# EAGLE board S.N.A.I.L (EAGLE 9.7.0)

Size 238.16 x 131.44 mm. Coordinates in mm from the lower left corner, seen from the top.
Outline: 0,0 238.16,0 238.16,131.44 0,131.44 0,0
Copper layers (1*16): Top 0.035mm / dielectric 1.5mm / Bottom 0.035mm
Design rules "default": minimum track width 6mil, minimum drill 0.35mm, track to track 6mil, track to pad 6mil, pad to pad 6mil, via to via 6mil, smd to smd 6mil, copper to edge 40mil, drill to drill 6mil, minimum pad ring 10mil, minimum via ring 8mil, stop-mask expansion 4mil, vias tented up to drill 0mil, thermal gap 10mil

## Footprints (pad centres in the part's own frame; a part is rotated, then mirrored left to right if it is on the bottom)
1X08 = drill 1.016 long: 1 -8.89,0; 2 -6.35,0; 3 -3.81,0; 4 -1.27,0; 5 1.27,0; 6 3.81,0; 7 6.35,0; 8 8.89,0
PIEZO = drill 1 pad 1.6: 1 -3.5,0; 2 3.5,0
RESAD1016W63L850D250B = drill 0.83 pad 1.43: 1 -5.08,0; 2 5.08,0
SWITCH-MOMENTARY-PTH-6.5MM = drill 1.016 pad 1.88: 1 -3.251,2.261; 2 3.251,2.261; 3 -3.251,-2.261; 4 3.251,-2.261
SM-S2309S = drill 1.016 long: 1 -2.54,0; 2 0,0; 3 2.54,0
ARDUINO-UNO-R3-SHIELD = drill 1.016 pad 1.88: 3.3V 24.13,-2.54; 5V 24.13,0; A0 24.13,12.7; A1 24.13,15.24; A2 24.13,17.78; A3 24.13,20.32; A4 24.13,22.86; A5 24.13,25.4; AREF -24.13,-13.97; D2 -24.13,20.32; D3 -24.13,17.78; D4 -24.13,15.24; D5 -24.13,12.7; D6 -24.13,10.16; D7 -24.13,7.62; D8 -24.13,3.81; D9 -24.13,1.27; D10 -24.13,-1.27; D11 -24.13,-3.81; D12 -24.13,-6.35; D13 -24.13,-8.89; GND@0 24.13,2.54; GND@1 24.13,5.08; GND@2 -24.13,-11.43; IOREF 24.13,-7.62; NC 24.13,-10.16; RES 24.13,-5.08; RX -24.13,25.4; SCL -24.13,-19.05; SDA -24.13,-16.51; TX -24.13,22.86; VIN 24.13,7.62

## Placement (x,y rotation side)
KEYPAD1  KEYPAD-4X4  [1X08]  13.41,66.27 0 top
PIEZO1  PIEZO  [PIEZO]  146.43,30.08 180 top
R1  1k  [RESAD1016W63L850D250B]  152.78,35.16 90 top
S1  SWITCH_MOMENTARY  [SWITCH-MOMENTARY-PTH-6.5MM]  130.9,26.1 90 top
SERVO4  SERVOSM-S2309S  [SM-S2309S]  230.76,16.73 0 top
SERVO5  SERVOSM-S2309S  [SM-S2309S]  231.18,70.1 0 top
SERVO6  SERVOSM-S2309S  [SM-S2309S]  231.05,125.16 0 top
SERVOSERVO_SERVO_8  SERVOSM-S2309S  [SM-S2309S]  189.26,125.06 0 top
SERVOSERVO_SERVO_9  SERVOSM-S2309S  [SM-S2309S]  190.05,69.95 0 top
SERVOSERVO_SERVO_10  SERVOSM-S2309S  [SM-S2309S]  191.53,16.66 0 top
U1  ARDUINO-UNO-R3-SHIELD  [ARDUINO-UNO-R3-SHIELD]  93.68,29.84 270 top

## Library data of the parts
KEYPAD1 PIEZO1 R1 S1 SERVO4-SERVO6 SERVOSERVO_SERVO_8-SERVOSERVO_SERVO_10 U1 = Tinkercad

## Nets
PIEZO1_1: PIEZO1.1 R1.1
S1_4: PIEZO1.2 S1.4
U1_5V: R1.2 SERVO4.1 SERVO5.1 SERVO6.1 SERVOSERVO_SERVO_8.1 SERVOSERVO_SERVO_9.1 SERVOSERVO_SERVO_10.1 U1.5V
U1_A2: S1.1 U1.A2
U1_A4: SERVO5.2 U1.A4
U1_A5: SERVO6.2 U1.A5
U1_D2: KEYPAD1.8 U1.D2
U1_D3: KEYPAD1.7 U1.D3
U1_D4: KEYPAD1.6 U1.D4
U1_D5: KEYPAD1.5 U1.D5
U1_D6: KEYPAD1.4 U1.D6
U1_D7: KEYPAD1.3 U1.D7
U1_D8: SERVOSERVO_SERVO_8.2 U1.D8
U1_D9: SERVOSERVO_SERVO_9.2 U1.D9
U1_D10: SERVOSERVO_SERVO_10.2 U1.D10
U1_D11: KEYPAD1.2 U1.D11
U1_D12: KEYPAD1.1 U1.D12
U1_D13: SERVO4.2 U1.D13
U1_GND: SERVO4.3 SERVO5.3 SERVO6.3 SERVOSERVO_SERVO_8.3 SERVOSERVO_SERVO_9.3 SERVOSERVO_SERVO_10.3 U1.GND@0 U1.GND@1 U1.GND@2

## Tracks (layer width: path | path; a pad name or v marks a point on that pad's centre or on a via)
PIEZO1_1  (1 unrouted)
S1_4  (1 unrouted)
U1_5V  (7 unrouted)
U1_A2  (1 unrouted)
U1_A4  (1 unrouted)
U1_A5  (1 unrouted)
U1_D2  (1 unrouted)
U1_D3  (1 unrouted)
U1_D4  (1 unrouted)
U1_D5  (1 unrouted)
U1_D6  (1 unrouted)
U1_D7  (1 unrouted)
U1_D8  (1 unrouted)
U1_D9  (1 unrouted)
U1_D10  (1 unrouted)
U1_D11  (1 unrouted)
U1_D12  (1 unrouted)
U1_D13  (1 unrouted)
U1_GND  (8 unrouted)